# EAGLE board object_1_milling (EAGLE 7.7.0)
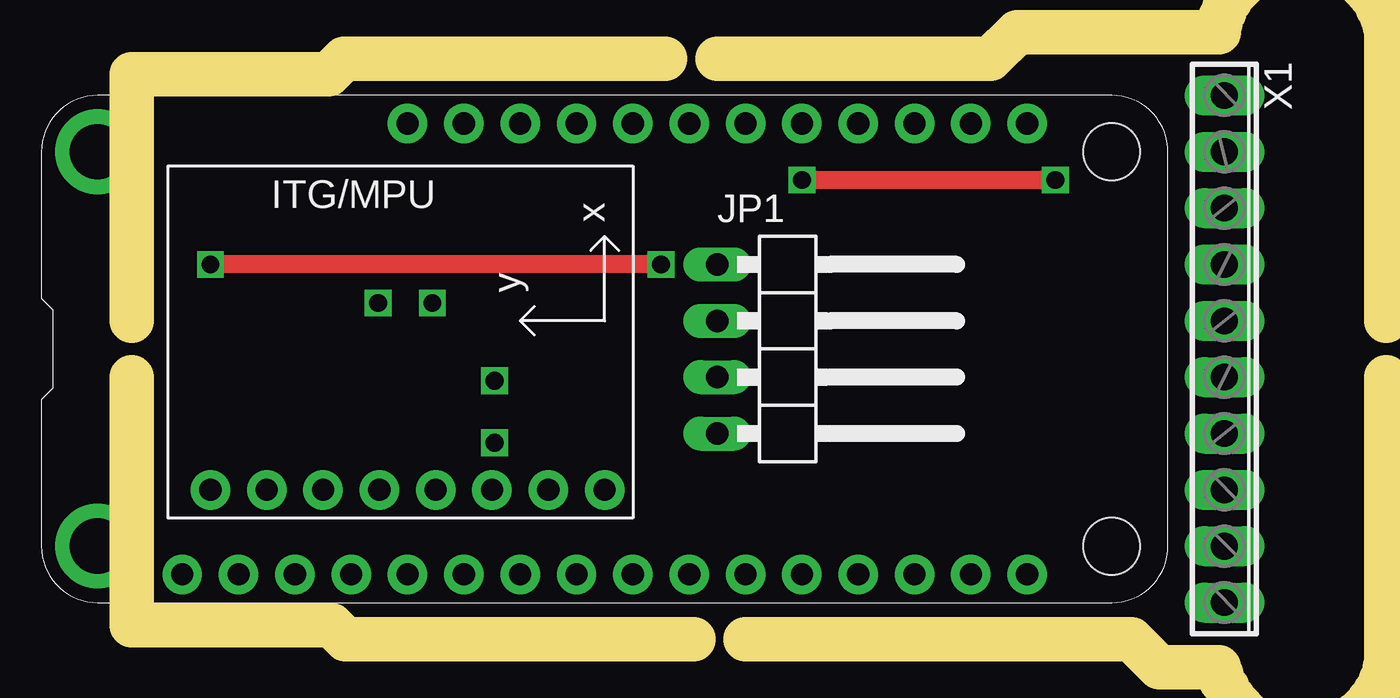
[diagram p0: board, top side]
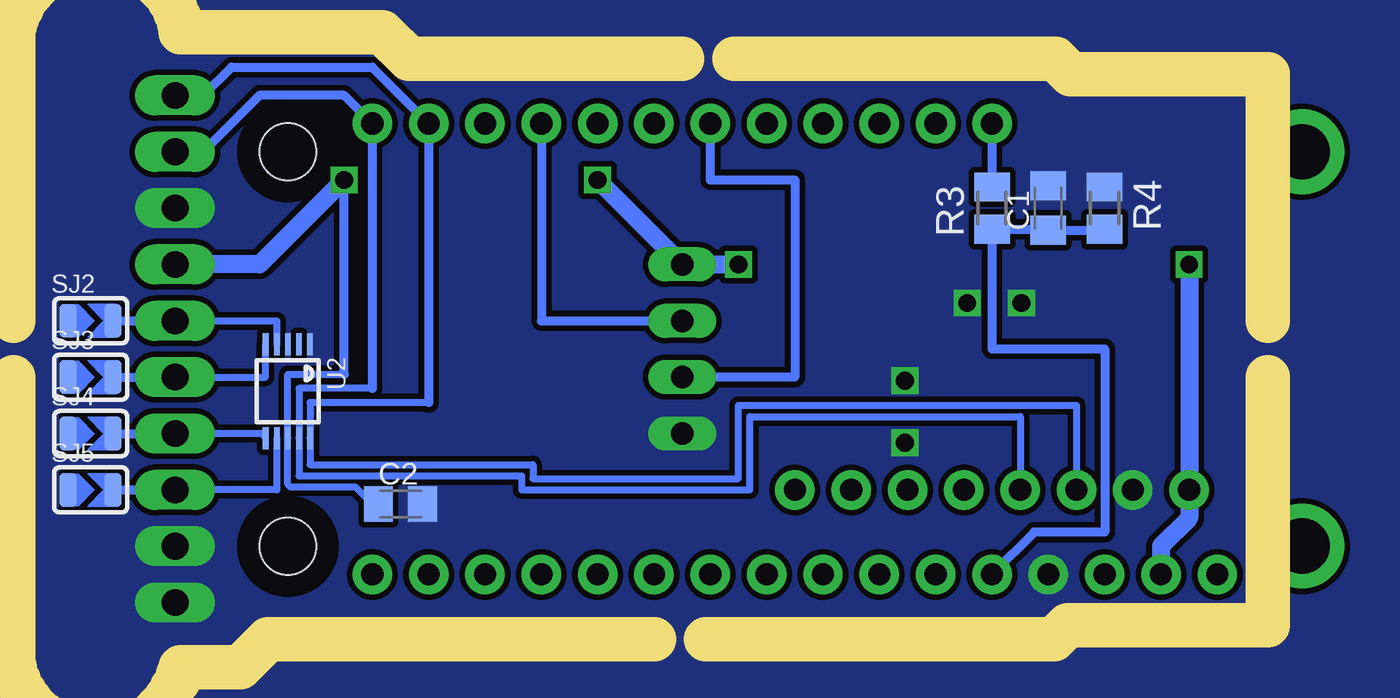
[diagram p1: board, bottom side, seen from below]

No outline drawn. Coordinates in mm, seen from the top.
Copper layers (1*16): Top 0.035mm / dielectric 1.5mm / Bottom 0.035mm
Design rules "default": minimum track width 10mil, minimum drill 24mil, track to track 8mil, track to pad 8mil, pad to pad 8mil, via to via 8mil, smd to smd 8mil, copper to edge 40mil, drill to drill 8mil, minimum pad ring 10mil, minimum via ring 8mil, stop-mask expansion 4mil, vias tented up to drill 0mil, thermal gap 10mil
Milling: 86 lines

## Footprints (pad centres in the part's own frame; a part is rotated, then mirrored left to right if it is on the bottom)
C0805K = smd 1.3 x 1.6: 1 -1,0; 2 1,0
1X04/90 = drill 1.016 long: 1 -3.81,-3.81; 2 -1.27,-3.81; 3 1.27,-3.81; 4 3.81,-3.81
FEATHERWING_DIM = drill 1 pad 1.778: 1 6.35,1.27; 2 8.89,1.27; 3 11.43,1.27; 4 13.97,1.27; 5 16.51,1.27; 6 19.05,1.27; 7 21.59,1.27; 8 24.13,1.27; 9 26.67,1.27; 10 29.21,1.27; 11 31.75,1.27; 12 34.29,1.27; 13 36.83,1.27; 14 39.37,1.27; 15 41.91,1.27; 16 44.45,1.27; 17 44.45,21.59; 18 41.91,21.59; 19 39.37,21.59; 20 36.83,21.59; 21 34.29,21.59; 22 31.75,21.59; 23 29.21,21.59; 24 26.67,21.59; 25 24.13,21.59; 26 21.59,21.59; 27 19.05,21.59; 28 16.51,21.59 | drill 2.5 pad 3.81: P$1 2.54,20.32; P$2 2.54,2.54 | hole 2.54: 48.26,20.32; 48.26,2.54
M0805 = smd 1.3 x 1.6: 1 -0.95,0; 2 0.95,0
SOLDERJUMPER_ARROW_NOPASTE = smd 0.762 x 1.524: 1 -1.016,0; 2 1.016,0
GY-521 = drill 1 pad 1.778: ADO -10.16,-6.35; GND -10.16,6.35; INT -10.16,-8.89; SCL -10.16,3.81; SDA -10.16,1.27; VCC -10.16,8.89; XCL -10.16,-3.81; XDA -10.16,-1.27
MSOP10 = smd 0.25 x 1: 1 -1,-2.113; 2 -0.5,-2.113; 3 0,-2.113; 4 0.5,-2.113; 5 1,-2.113; 6 1,2.113; 7 0.5,2.113; 8 0,2.113; 9 -0.5,2.113; 10 -1,2.113
10POL254 = drill 1.2 long: 1 -11.43,0; 2 -8.89,0; 3 -6.35,0; 4 -3.81,0; 5 -1.27,0; 6 1.27,0; 7 3.81,0; 8 6.35,0; 9 8.89,0; 10 11.43,0

## Placement (x,y rotation side)
C1  [C0805K]  15.24,36.83 90 bottom
C2  .1  [C0805K]  44.45,23.5 0 bottom
JP1  [1X04/90]  35.56,30.48 270 top
MS1  FEATHERWING_NODIM  [FEATHERWING_DIM]  1.27,19.05 0 top
R3  1M  [M0805]  17.78,36.83 90 bottom
R4  220k  [M0805]  12.7,36.83 270 bottom
SJ2  [SOLDERJUMPER_ARROW_NOPASTE]  58.42,31.75 0 bottom
SJ3  [SOLDERJUMPER_ARROW_NOPASTE]  58.42,29.21 0 bottom
SJ4  [SOLDERJUMPER_ARROW_NOPASTE]  58.42,26.67 0 bottom
SJ5  [SOLDERJUMPER_ARROW_NOPASTE]  58.42,24.13 0 bottom
U1  GY-521MPU6050  [GY-521]  17.78,34.29 90 top
U2  [MSOP10]  49.53,28.57 180 bottom
X1  [10POL254]  54.61,30.48 270 top

## Library data of the parts
C1 C2 = rcl
JP1 = pinhead
MS1 = adafruit
R3 R4 = resistor
SJ2-SJ5 = microbuilder; BOM: EXCLUDE
U1 = gy-521
U2 = microbuilder
X1 = con-phoenix-254; OC_FARNELL: unknown; OC_NEWARK: unknown

## Nets
+3V3: C2.1 JP1.1 MS1.2 U1.VCC U2.8 X1.4
AD0: C1.1 MS1.5 R3.1 R4.2
ALERT: U2.2
BTN: JP1.3 MS1.23
CLK: MS1.14
CS_MCP3008: MS1.15
GND: C1.2 C2.2 JP1.4 MS1.4 R4.1 SJ2.1 SJ3.1 SJ4.1 SJ5.1 U1.GND U2.1 U2.3 X1.3 X1.9 X1.10
LED_GND: JP1.2 MS1.20
MISO: MS1.13
MOSI: MS1.12
N$2: SJ2.2 U2.4 X1.5
N$3: SJ3.2 U2.5 X1.6
N$4: SJ4.2 U2.6 X1.7
N$5: SJ5.2 U2.7 X1.8
SCL: MS1.18 U1.SCL U2.10 X1.1
SDA: MS1.17 U1.SDA U2.9 X1.2
VBAT: MS1.28 R3.2

## Tracks (layer width: path | path; a pad name or v marks a point on that pad's centre or on a via)
+3V3  (via drill 0.8)
  Top 0.813: v35.56,38.1 v46.99,38.1 | v29.21,34.29 v8.89,34.29
  Bottom 0.305: 46.99,29.34 49.53,29.34 U2.8 49.53,24.38 49.4,24.26 46.48,24.26 45.72,23.5 C2.1
  Bottom 0.406: 46.99,29.34 v46.99,38.1
  Bottom 0.813: v35.56,38.1 JP1.1 v29.21,34.29 | v8.89,34.29 U1.VCC 8.89,22.86 10.16,21.59 MS1.2 | 53.34,34.29 X1.4 50.8,34.29 v46.99,38.1
AD0
  Bottom 0.406: R4.2 12.75,35.83 C1.1 15.29,35.88 R3.1 17.78,30.48 12.7,30.48 12.7,22.23 15.88,22.23 MS1.5
BTN
  Bottom 0.406: JP1.3 26.67,29.21 26.67,38.1 30.48,38.1 MS1.23
GND  (via drill 0.8)
  other vias: 16.45,32.55 18.9,32.55 21.7,29.05 21.7,26.25
  pour Bottom (isolate 0.254, no thermals): -1.27,10.16 66.04,10.16 66.04,52.07 -1.27,52.07
LED_GND
  Bottom 0.406: MS1.20 38.1,31.75 JP1.2
N$2
  Bottom 0.305: X1.5 50.03,31.75 U2.4
  Bottom 0.406: SJ2.2 X1.5
N$3
  Bottom 0.305: X1.6 50.53,29.21 U2.5
  Bottom 0.406: SJ3.2 X1.6
N$4
  Bottom 0.305: U2.6 50.66,26.67 X1.7
  Bottom 0.406: SJ4.2 X1.7
N$5
  Bottom 0.305: U2.7 50.03,24.13 X1.8
  Bottom 0.406: SJ5.2 X1.8
SCL
  Bottom 0.305: 43.18,28.07 48.53,28.07 U2.10 48.53,25.27 38.48,25.27 38.48,24.64 29.21,24.64 29.21,27.94 13.97,27.94 U1.SCL
  Bottom 0.406: 43.18,28.07 MS1.18 45.72,43.18 52.07,43.18 53.34,41.91 X1.1
SDA
  Bottom 0.305: 45.72,28.7 49.03,28.7 U2.9 49.03,24.77 38.99,24.77 38.99,24.13 28.7,24.13 28.7,27.43 16.51,27.43 U1.SDA
  Bottom 0.406: 45.72,28.7 MS1.17 46.99,41.91 50.8,41.91 53.34,39.37 X1.2
VBAT
  Bottom 0.406: MS1.28 R3.2